# Altium PCB Angle-Sensor_V1.0.PcbDoc
Units mil, origin at the board's own origin, x right, y up, seen from the top; angles counter-clockwise.
Board outline 2411.27 x 649.61 mil, 2 copper layers (Top Layer, Bottom Layer), stack 60.967 mil thick; 12 components, 8 nets, 32 pads, 66 vias.
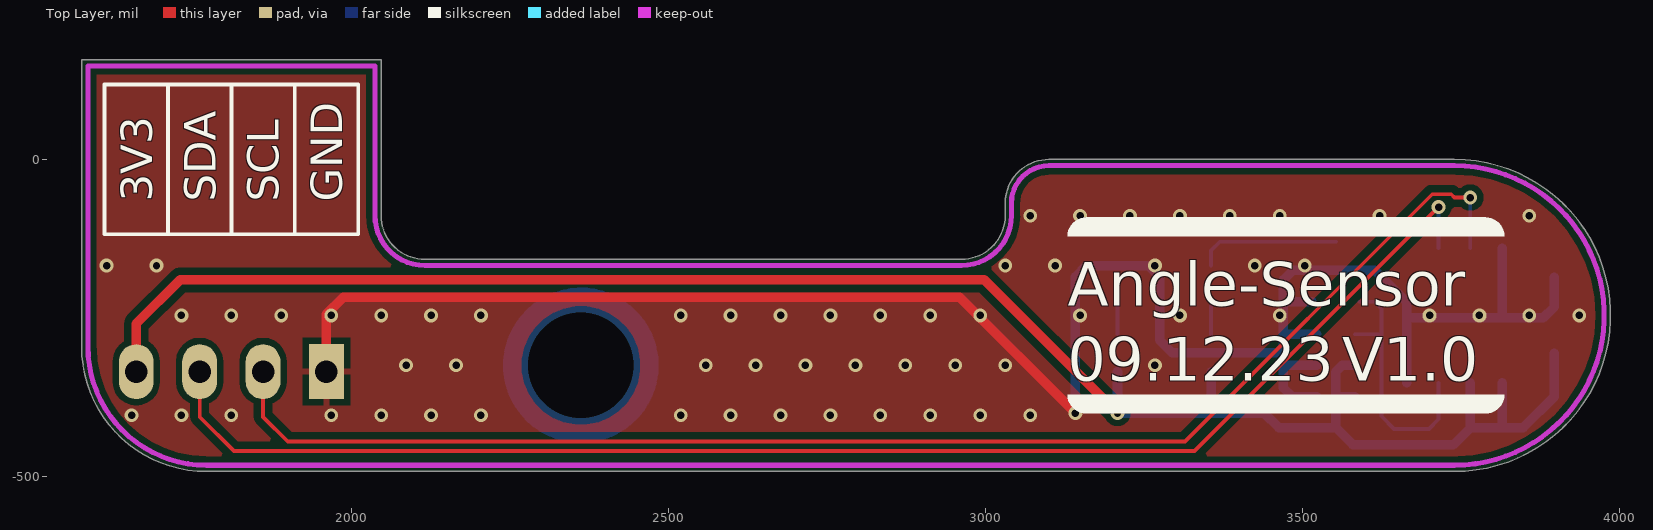
[diagram p0: Top Layer view]
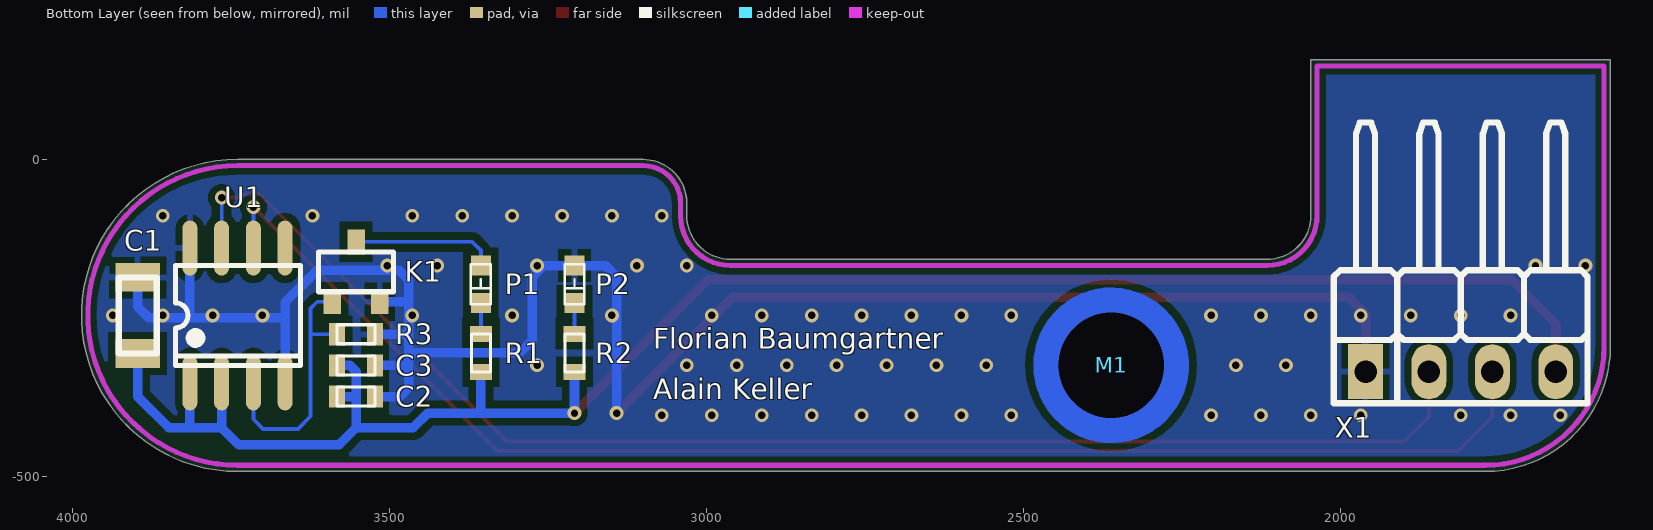
[diagram p1: Bottom Layer view, seen from below]

## Layer stack, top to bottom
Top Solder: solder mask 0.3937, Solder Resist, Dk 3.5
Top Layer: signal copper 1.4173
Dielectric1: dielectric 58.1323, FR-4, Dk 4.8
Bottom Layer: signal copper 1.4173
Bottom Solder: solder mask 0.3937, Solder Resist, Dk 3.5

## Board outline
1574.8,-295.28 1574.8,157.48 2047.24,157.48 2047.24,-88.58 ccw(c2116.14,-88.58) 2116.14,-157.48 2962.6,-157.48 ccw(c2962.6,-88.58) 3031.5,-88.58 3031.5,-68.9 cw(c3100.39,-68.9) 3100.39,0 3740.16,0 cw(c3740.16,-246.06) 3740.16,-492.13 1771.65,-492.13 cw(c1771.65,-295.28)

## Design rules (kind name [scope] priority, off if disabled: settings)
Clearance "Stitching GND" [IsStitchingVia and InNet('GND') vs (IsVia and (Not IsStitchingVia)) Or IsPad] p1: gap=5 ignorepadtopadclearanceinfootprint=FALSE
Clearance Clearance_Poly_GND_DiffPair [InPolygon and (InNet('GND') OR InNet('3V3') OR InNet('5V') OR InNet('1V8')) vs InAnyDifferentialPair] p2: gap=33 ignorepadtopadclearanceinfootprint=FALSE
Clearance Clearance_Poly_GND_Top [InPolygon and InNet('GND') vs OnLayer('Top Layer')] p3: gap=12 ignorepadtopadclearanceinfootprint=FALSE
Clearance Clearance_Poly_GND_Bottom [InPolygon and InNet('GND') vs OnLayer('Bottom Layer')] p4: gap=12 ignorepadtopadclearanceinfootprint=FALSE
Clearance Clearance_Poly [InPolygon vs Not InNet('GND')] p5: gap=10 ignorepadtopadclearanceinfootprint=FALSE
Clearance Clearance_Via [isvia AND (AsMM(HoleDiameter) = 0.2) vs isvia AND (AsMM(HoleDiameter) = 0.2)] p6: gap=9.8 ignorepadtopadclearanceinfootprint=FALSE
Clearance [All] p7: gap=3.5 ignorepadtopadclearanceinfootprint=FALSE except(5: SMDPad-SMDPad)
ComponentClearance Component_Display [(Identifier = 'Spacer') OR (Identifier = 'Baseplate')] p1: gap=0 collisioncheckmode=3 verticalgap=0 showdistances=FALSE
ComponentClearance Component_Connectors [(Footprint = 'SMD Connector (SM04B-SRSS-TB)')] p2: gap=0 collisioncheckmode=3 verticalgap=0 showdistances=FALSE
ComponentClearance [All] p3: gap=0 collisioncheckmode=3 verticalgap=1.57 showdistances=TRUE
DiffPairsRouting [All] p1: maxlimit=100 minlimit=3.5 mostfreqgap=5 toplayer_minwidth=5 toplayer_maxwidth=15 toplayer_prefwidth=5 bottomlayer_minwidth=5 bottomlayer_maxwidth=15 bottomlayer_prefwidth=5 maxuncoupledlength=500
Height [All] p1: minheight=0 maxheight=5905.51 prefheight=78.74
HoleSize [All] p1: absolutevalues=TRUE maxlimit=800 minlimit=7.87 maxpercent=80.000 minpercent=20.000
HoleToHoleClearance [InDrillLayerPair('Top Layer - Bottom Layer')] p1: gap=19.68 allowstackedmicrovias=FALSE
MinimumAnnularRing [All] p1: minimumring=3.5
MinimumSolderMaskSliver [All] p1: minsoldermaskwidth=0
PlaneConnect [All] p1: pad.planeconnectstyle=Relief pad.reliefexpansion=20 pad.reliefentries=4 pad.reliefconductorwidth=10 pad.reliefairgap=10 via.planeconnectstyle=Direct via.reliefexpansion=20 via.reliefentries=4 via.reliefconductorwidth=10 via.reliefairgap=10
PolygonConnect [All] p1: thpad.connectstyle=Relief thpad.reliefconductorwidth=10 thpad.reliefentries=4 thpad.polygonreliefangle="90 Angle" thpad.airgapwidth=10 smdpad.connectstyle=Relief smdpad.reliefconductorwidth=10 smdpad.reliefentries=4 smdpad.polygonreliefangle="90 Angle" smdpad.airgapwidth=10 via.connectstyle=Direct via.reliefconductorwidth=10 via.reliefentries=4 via.polygonreliefangle="90 Angle" via.airgapwidth=10
RoutingVias [All] p1: holewidth=11.81 width=24.41 viastyle="Through Hole" minholewidth=7.87 minwidth=17.32 maxholewidth=31.5 maxwidth=43.31
SilkToSilkClearance [All] p1: silktosilkclearance=0
SilkToSolderMaskClearance [IsPad] p1: minsilkscreentomaskgap=0 clearancetoexposedcopper=TRUE
SolderMaskExpansion [All] p1: expansion=4 istentingtop=FALSE
Width [Not InNet('No Net')] p1: maxlimit=157.48 minlimit=3.5 preferedwidth=10
Width Logos [All] p2: maxlimit=10 minlimit=0.1 preferedwidth=0.1
21 further rules are at their usual default settings.

## Components (designator, comment, footprint, x,y, rotation, side; value= is the part's Value field where it differs from the comment)
C1 "10µF" "SMD Keramikkondensator 1206" 3897.64,-246.06 r270 bottom
C2 "1µF" "SMD Keramikkondensator 0603" 3553.15,-374.02 r0 bottom
C3 "100nF" "SMD Keramikkondensator 0603" 3553.15,-324.8 r180 bottom
K1 "2N7002" "SMD MOSFET SOT-23" 3553.15,-177.17 r90 bottom
M1 "SMTSO-M3-3ET" "SMD Solder-Nut (M3 3mm)" 2362.2,-324.8 r180 bottom locked
P1 "Yellow" "SMD LED 0603" 3356.3,-196.85 r90 bottom
P2 "Green" "SMD LED 0603" 3208.66,-196.85 r90 bottom
R1 "1k" "SMD Widerstand 0603" 3356.3,-305.12 r270 bottom
R2 "1k" "SMD Widerstand 0603" 3208.66,-305.12 r270 bottom
R3 "10k" "SMD Widerstand 0603" 3553.15,-275.59 r0 bottom
U1 "AS5600" "SMD IC SOIC-8" 3740.16,-246.06 r0 bottom
X1 "PZ254R-11-04P" "THT Pin-Header 4x1 (90°)" 1811.02,-334.65 r180 bottom locked

## Footprints (in the part's own frame and the unit in brackets; to place one, negate y for a bottom-side part, rotate by r counter-clockwise, add the part's x,y. Pads: shape width x height; smd on the part's side, far side on the other; paste and mask are expansions set on the pad)
"SMD IC SOIC-8" [mm]
  oval 0.6x2.2 smd: 1(1.905,2.7) 2(0.635,2.7) 3(-0.635,2.7) 4(-1.905,2.7) 5(-1.905,-2.7) 6(-0.635,-2.7) 7(0.635,-2.7) 8(1.905,-2.7)
  silkscreen extent -2.52,-2 2.48,2, body extent -2.52,-3.12 2.48,3.12, height 1.75
"SMD Keramikkondensator 0603" [mil]
  rect 25x35 smd: 1(-30,0) 2(30,0)
  silkscreen extent -30,-15 30,15, body extent -31,-16 31,16, height 32
"SMD Keramikkondensator 1206" [mil]
  rect 45x70 smd: 1(-60,0) 2(60,0)
  silkscreen extent -60,-30 60,30, body extent -63,-31 63,31, height 39
"SMD LED 0603" [mm] "SMD_LED_RED"
  rect 0.8x0.8 smd: A(-0.75,0) K(0.75,0)
  silkscreen extent -0.8,-0.4 0.8,0.4, body extent -0.81,-0.37 0.84,0.36, height 0.68
"SMD MOSFET SOT-23" [mm]
  rect 1x0.7 smd: D(1.2,0) G(-1.2,0.95) S(-1.2,-0.95)
  silkscreen extent -0.8,-1.5 0.8,1.5, body extent -1.3,-1.5 1.2,1.5, height 1.1
"SMD Solder-Nut (M3 3mm)" [mm]
  round 0 hole 4.22: 1(0,0)
  Top Layer circle w1.02: c0,0 r2.61
  body extent -2.61,-2.61 2.61,2.61, height 3
"SMD Widerstand 0603" [mil]
  rect 25x35 smd: 1(-30,0) 2(30,0)
  silkscreen extent -30,-15 30,15, body extent -31,-16 31,16, height 18
"THT Pin-Header 4x1 (90°)" [mm]
  rect 1.4x2.2 hole 0.9: 1(-3.81,0)
  oval 1.4x2.2 hole 0.9: 2(-1.27,0) 3(1.27,0) 4(3.81,0)
  silkscreen extent -5.08,-1.27 5.08,9.98, body extent -5.08,-0.38 5.08,9.98, height 2.54

## Part data
C1: library part "E6 - 10uF", "SMD Ceramic Capacitor E6", Component Value="10µF 50V", JLC-Parts=C13585, Component Description="Multilayer Ceramic Capacitors MLCC", ComponentLink1Description=Datasheet, ComponentLink1URL=https://datasheet.lcsc.com/lcsc/1810191219_Samsung-Electro-Mechanics-CL10A106KP8NNNC_C19702.pdf, Digikey=587-3258-1-ND, Farnell=2113070, Mouser=963-LMK107BBJ106MALT, Unit Price=0.01
C2: library part C-CAPACITOR, "CAP-MK", Component Value="1µF 50V", JLC-Parts=C15849, Component Description="Multilayer Ceramic Capacitors", Digikey=1276-1860-1-ND, Farnell=3013383, Mouser=187-CL10A105KB8NNNC, Unit Price=0.01
C3: library part "E6 - 100nF", "SMD Ceramic Capacitor E6", Component Value="100nF 50V", JLC-Parts=C14663, Component Description="Multilayer Ceramic Capacitors", ComponentLink1Description=Datasheet, ComponentLink1URL=https://datasheet.lcsc.com/lcsc/1809301912_YAGEO-CC0603KRX7R9BB104_C14663.pdf, Digikey=445-5666-1-ND, Farnell=2522432, Mouser=77-VJ0603V104ZXAPBC, Unit Price=0.01
K1: library part K-FET:NIGE, "MOSFET N-Channel", JLC-Parts=C8545, Component Description="MOSFET N-Channel", Component Value=2N7002, ComponentLink1Description=Datasheet, ComponentLink1URL=https://datasheet.lcsc.com/lcsc/1810151612_Jiangsu-Changjing-Electronics-Technology-Co---Ltd--2N7002_C8545.pdf, Digikey=2N7002NCT-ND, Farnell=1713823, Mouser=512-2N7002, Unit Price=0.02
M1: library part M-Spacer_M3_3mm, "Solderable Standoff Nut", Component Value="M3 3mm", JLC-Parts=C2915308, Component Description="Solderable Standoff Nut", ComponentLink1Description=Datasheet, ComponentLink1URL=https://datasheet.lcsc.com/lcsc/2112061830_Sinhoo-SMTSO3030CTJ_C2915308.pdf, Mouser=153-SMTSO-M3-3ET, Unit Price=0.05
P1: library part P-LED, "LED (als Lampe E / alt H)", Component Value="Yellow (5mA, 2.1V)", JLC-Parts=C72038, Component Description="General Purpose LED", ComponentLink1Description=Datasheet, ComponentLink1URL=https://datasheet.lcsc.com/szlcsc/Everlight-Elec-19-213-Y2C-CQ2R2L-3T-CY_C72038.pdf, Digikey=350-2033-1-ND, Farnell=1867103, Mouser=645-598-8050-107F, Unit Price=0.34
P2: library part "LED Green 0603", "General Purpose LED", Component Value="Green (5mA, 2.4V)", JLC-Parts=C72043, Component Description="General Purpose LED", ComponentLink1Description=Datasheet, ComponentLink1URL=https://datasheet.lcsc.com/szlcsc/Everlight-Elec-19-217-GHC-YR1S2-3T_C72043.pdf, Digikey=350-2035-1-ND, Farnell=1465991, Mouser=645-598-8070-107F, Unit Price=0.34
R1 R2: library part R-RESISTOR, "RES (E=Heizwiderstand B=Messwandler)", Component Value="1k (75V, 100mW, 1%)", JLC-Parts=C21190, Component Description="Dickschicht Chipwiderstand", Digikey=P1.00KHCT-ND, Farnell=2303145, Mouser=667-ERJ-3EKF1001V, Unit Price=0.01
R3: library part R-RESISTOR, "RES (E=Heizwiderstand B=Messwandler)", Component Value="10k (75V, 100mW, 1%)", JLC-Parts=C25804, Component Description="Thick Film Chip Resistor", Digikey=P10.0KHCT-ND, Farnell=2303192, Mouser=667-ERJ-3EKF1002V, Unit Price=0.01
U1: library part U-AS5600, "Digital Magnetic Angle Sensor", JLC-Parts=C499458, Component Description="Digital Magnetic Angle Sensor", Component Value=AS5600, ComponentLink1Description=Datasheet, ComponentLink1URL=https://ams.com/documents/20143/36005/AS5600_DS000365_5-00.pdf, Digikey=AS5600-ASOMCT-ND, Farnell=4158625, Mouser=985-AS5600-ASOM, Unit Price=1.32
X1: library part "X-Stiftleiste (4-Fach, Right-Angle)", "Pin Header (Right-Angle)", JLC-Parts=C492412, Component Description="Pin Header (Right-Angle)", Component Value=PZ254R-11-04P, Digikey=952-3286-ND, Farnell=3226010, Mouser=855-M20-9960445, Unit Price=0.02

## Via types
v1: diameter 21.65, hole 11.81, Top Layer to Bottom Layer, tented both sides, 66 vias

## Nets (pads, with @x,y where several pads share a name; then routed paths per layer and width w, separated by ;. In a path a pad name is that pad's centre, name@x,y a point inside that pad or via, vN(x,y) a via of type N, cw(c..) or ccw(c..) an arc to the next point about the centre after c; other vN are vias at no path point)
3V3: C1.2 C2.2 C3.1 R1.2 R2.2 U1.1 U1.2 X1.4 | length 2972.1
  Top Layer w15: X1.4 1661.02,-258.98 1730,-190 2998.66,-190 v1(3208.66,-400)
  Bottom Layer w15: R2.2 v1(3208.66,-400) 3356.3,-400 ; R1.2 3356.3,-400 ; C2.2 3553.15,-374.02 ; C3.1 3562.99,-324.8 3553.15,-334.65 3553.15,-374.02 ; U1.2 3765.16,-423.23 ; U1.1 3815.16,-423.23 ; C1.2 3897.64,-374.02 3848.43,-423.23 3815.16,-423.23 ; 3356.3,-400 3440,-400 3463.23,-423.23 3553.15,-423.23 ; 3553.15,-423.23 3579.92,-450 3738.39,-450 3765.16,-423.23 ; 3553.15,-423.23 3553.15,-374.02 ; 3765.16,-423.23 3815.16,-423.23
GND: C1.1 C2.1 C3.2 K1.S P2.K R3.1 U1.4 U1.8 X1.1 | length 3153.9
  Top Layer w15: X1.1 1961.02,-243.98 1987.48,-217.52 2959.84,-217.52 v1(3142.32,-400)
  Bottom Layer w15: v1(3142.32,-400) 3142.32,-185 3160,-167.32 P2.K 3257.32,-167.32 3275,-185 3275,-285 3295,-305 3465,-305 3470,-310 ; K1.S 3470.59,-224.41 3470,-225 ; C2.1 3484.02,-374.02 3470,-360 3470,-325 ; C3.2 3470.2,-324.8 3470,-325 ; R3.1 3470.59,-275.59 3470,-275 ; U1.4 3665.16,-250.16 ; U1.8 3815.16,-249.84 3815,-250 ; C1.1 3897.64,-232.36 3880,-250 3815,-250 ; 3470,-325 3470,-310 ; 3470,-310 3470,-275 ; 3470,-275 3470,-225 ; 3470,-225 3470,-190 3485,-175 3615,-175 3665.16,-225.16 3665.16,-250 ; 3665.16,-250.16 3665.16,-250 ; 3665.16,-250.16 3665,-250 3665.16,-250 ; 3665.16,-250 3815,-250
  other v1: 1653.55,-403.54 1732.29,-403.54 1811.03,-403.54 1968.51,-403.54 2047.25,-403.54 2125.99,-403.54 2204.73,-403.54 2519.69,-403.54 2598.43,-403.54 2677.17,-403.54 2755.91,-403.54 2834.65,-403.54 2913.39,-403.54 2992.13,-403.54 3070.87,-403.54 2086.62,-324.8 2165.36,-324.8 2559.06,-324.8 2637.8,-324.8 2716.54,-324.8 2795.28,-324.8 2874.02,-324.8 2952.76,-324.8 3031.5,-324.8 3267.72,-324.8 1732.29,-246.06 1811.03,-246.06 1889.77,-246.06 1968.51,-246.06 2047.25,-246.06 2125.99,-246.06 2204.73,-246.06 2519.69,-246.06 2598.43,-246.06 2677.17,-246.06 2755.91,-246.06 2834.65,-246.06 2913.39,-246.06 2992.13,-246.06 3149.61,-246.06 3307.09,-246.06 3464.57,-246.06 3700.79,-246.06 3779.53,-246.06 3858.27,-246.06 3937.01,-246.06 1614.18,-167.32 1692.92,-167.32 3031.5,-167.32 3110.24,-167.32 3267.72,-167.32 3425.2,-167.32 3503.94,-167.32 3070.87,-88.58 3149.61,-88.58 3228.35,-88.58 3307.09,-88.58 3385.83,-88.58 3464.57,-88.58 3622.05,-88.58 3858.27,-88.58
NetK1_D: K1.D P1.K | length 226.2
  Bottom Layer w6: P1.K 3356.3,-143.7 3370.08,-129.92 K1.D
NetK1_G: K1.G R3.2 U1.3 | length 412.9
  Bottom Layer w6: R3.2 3625,-275.59 ; K1.G 3614.41,-224.41 3625,-235 3625,-275.59 ; U1.3 3715.16,-409.84 3700,-425 3645,-425 3625,-405 3625,-275.59
NetP1_A: P1.A R1.1 | length 48.7
  Bottom Layer w6: R1.1 P1.A
NetP2_A: P2.A R2.1 | length 48.7
  Bottom Layer w6: R2.1 P2.A
NetU1_6: U1.6 X1.3 | length 2272
  Top Layer w6: X1.3 1761.02,-406.02 1815,-460 3330,-460 v1(3715,-75)
  Bottom Layer w6: v1(3715,-75) 3715,-139.61 U1.6
NetU1_7: U1.7 X1.2 | length 2234.8
  Top Layer w6: X1.2 1861.02,-406.02 1899.88,-444.88 3315.12,-444.88 3705,-55 3735,-55 3740.16,-60.16 v1(3765.16,-60.16)
  Bottom Layer w6: U1.7 v1(3765.16,-60.16)
pads on no net: M1.1 U1.5
copper on no net:
  other v1: 5523.62,-4163.39

## Polygon pours and split planes (outlines as drawn)
GND on Top Layer "NONET_L-01_P-001" (solid, remove dead copper, pour order 0): 1574.8,157.48 2047.24,157.48 2047.24,-88.58 ccw(c2116.14,-88.58) 2116.14,-157.48 2962.6,-157.48 ccw(c2962.6,-88.58) 3031.5,-88.58 3031.5,-68.9 cw(c3100.39,-68.9) 3100.39,0 3740.16,0 cw(c3740.16,-246.06) 3986.22,-246.06 cw(c3740.16,-246.06) 3740.16,-492.13 1771.65,-492.13 cw(c1771.65,-295.28) 1574.8,-295.28
GND on Bottom Layer "NONET_L-01_P-001" (solid, remove dead copper, pour order 1): 1574.8,157.48 2047.24,157.48 2047.24,-88.58 ccw(c2116.14,-88.58) 2116.14,-157.48 2962.6,-157.48 ccw(c2962.6,-88.58) 3031.5,-88.58 3031.5,-68.9 cw(c3100.39,-68.9) 3100.39,0 3740.16,0 cw(c3740.16,-246.06) 3986.22,-246.06 cw(c3740.16,-246.06) 3740.16,-492.13 1771.65,-492.13 cw(c1771.65,-295.28) 1574.8,-295.28

## Keep-outs
Keep-Out Layer:
  lines w8: 1584.65,-295.28 ccw(c1771.65,-295.28) 1771.65,-482.28 3740.16,-482.28 ccw(c3740.16,-246.06) 3740.16,-9.84 3100.39,-9.84 ccw(c3100.39,-68.9) 3041.34,-68.9 3041.34,-88.58 cw(c2962.6,-88.58) 2962.6,-167.32 2116.14,-167.32 cw(c2116.14,-88.58) 2037.4,-88.58 2037.4,147.64 1584.65,147.64 1584.65,-295.28

## Silkscreen, mask and mechanical layers (free items; w line width, h text height)
Top Overlay:
  region: 3129.92,-121.02 cw(c3159.45,-121.02) 3159.45,-91.49 3789.37,-91.49 cw(c3789.37,-121.02) 3818.9,-121.02
  region: 3129.92,-371.11 ccw(c3159.45,-371.11) 3159.45,-400.64 3789.37,-400.64 ccw(c3789.37,-371.11) 3818.9,-371.11
  lines w6: 1711.02,-118.11 1711.02,118.11 ; 1811.02,-118.11 1811.02,118.11 ; 1911.02,-118.11 1911.02,118.11 ; 1611.02,-118.11 2011.02,-118.11 2011.02,118.11 1611.02,118.11 1611.02,-118.11
  text "3V3" at 1686.02,-66.65 h50 r90
  text "SDA" at 1786.02,-66.65 h50 r90
  text "SCL" at 1886.02,-66.65 h50 r90
  text "GND" at 1986.02,-66.65 h50 r90
  text "Angle-Sensor" at 3129.92,-253.62 h118.11
  text "09.12.23" at 3129.92,-371.73 h118.11
  text "V1.0" at 3562.99,-371.73 h118.11
Bottom Overlay:
  text "Florian Baumgartner" at 3084.55,-298.3 h32
  text "Alain Keller" at 3084.55,-377.86 h32
Mechanical 1:
  the board outline again, w10
Mechanical 15:
  lines w5: -3014.96,-2046.85 -2814.96,-2046.85 ; -3014.96,-146.85 -2814.96,-146.85 ; -3014.96,1753.15 -2814.96,1753.15 ; -2814.96,-3446.85 1685.04,-3446.85 ; -2814.96,-3146.85 1685.04,-3146.85 ; -1914.96,-3746.85 -1914.96,-3146.85 ; -139.96,-3946.85 -139.96,-3746.85 ; -139.96,3453.15 -139.96,3653.15 ; 185.04,-3746.85 185.04,-3146.85 185.04,-2546.85 ; 185.04,-2846.85 1685.04,-2846.85 ; 2735.04,-3946.85 2735.04,-3746.85 ; 2735.04,3453.15 2735.04,3653.15 ; 3085.04,-3746.85 1685.04,-3746.85 ; 5610.04,-3946.85 5610.04,-3746.85 ; 5610.04,3453.15 5610.04,3653.15 ; 7894.49,-2057.09 8094.49,-2057.09 ; 7894.49,-127.95 8094.49,-127.95 ; 7894.49,1761.81 8094.49,1761.81 ; -2814.96,-3746.85 7894.49,-3750 7894.49,3454.72 -2814.96,3453.15 -2814.96,-3746.85 ; -2814.96,-3746.85 1685.04,-3746.85 ; -2814.96,-3746.85 -2814.96,-2546.85 185.04,-2546.85 ; 185.04,-2546.85 1685.04,-2546.85 1685.04,-3746.85 ; -3014.96,-3946.85 8091.34,-3946.85 8091.34,3651.57 -3014.96,3653.15 -3014.96,-3946.85
  text "4" at -1551.96,3518.15 h70
  text "3" at 1318.04,3518.15 h70
  text "2" at 4198.04,3518.15 h70
  text "1" at 7058.04,3518.15 h70
  text "A" at 8051.97,2627.95 h70
  text "A" at -2889.96,2612.15 h70
  text "B" at 8012.6,738.19 h70
  text "B" at -2889.96,720.15 h70
  text "C" at -2889.96,-1189.85 h70
  text "C" at 8012.6,-1190.94 h70
  text "TITLE:" at 135.04,-2646.85 h45
  text "ENGINEER:" at 1635.04,-2646.85 h45
  text "Florian Baumgartner" at 1576.14,-2798.15 h70
  text "PCB DESIGNER:" at 1635.04,-2941.85 h45
  text "Angle-Sensor" at 110.59,-2965.16 h157.48
  text "D" at -2889.96,-3079.85 h70
  text "D" at 8012.6,-3080.71 h70
  text "Florian Baumgartner" at 1576.14,-3098.15 h70
  text "REV:" at -1964.96,-3246.85 h45
  text "PART NO.:" at 135.04,-3246.85 h45
  text "DATE:" at 1635.04,-3246.85 h45
  text "02.12.2023" at 1585.04,-3366.85 h70
  text "V1.1" at -1998.86,-3398.15 h70
  text "1/1" at 126.14,-3398.15 h70
  text "SCALE:" at -1964.96,-3546.85 h45
  text "DWG NO:" at 135.04,-3546.85 h45
  text "FILE NAME:" at 1635.04,-3546.85 h45
  text "Angle-Sensor_V1.0.PcbDoc" at 1576.14,-3673.15 h57.09
  text "1:1" at -1998.86,-3698.15 h70
  text "1/1" at 126.14,-3698.15 h70
  text "4" at -1551.96,-3881.85 h70
  text "3" at 1318.04,-3881.85 h70
  text "2" at 4198.04,-3881.85 h70
  text "1" at 7058.04,-3881.85 h70
Mechanical 16:
  lines w5: -3014.96,-2057.09 -2814.96,-2057.09 ; -3014.96,-127.95 -2814.96,-127.95 ; -3014.96,1761.81 -2814.96,1761.81 ; -530.51,-3946.85 -530.51,-3746.85 ; -530.51,3453.15 -530.51,3653.15 ; 1994.49,-3746.85 3394.49,-3746.85 ; 2344.49,-3946.85 2344.49,-3746.85 ; 2344.49,3453.15 2344.49,3653.15 ; 3394.49,-3446.85 7894.49,-3446.85 ; 3394.49,-3146.85 7894.49,-3146.85 ; 3394.49,-2846.85 4894.49,-2846.85 ; 4894.49,-3746.85 4894.49,-3146.85 4894.49,-2546.85 ; 5219.49,-3946.85 5219.49,-3746.85 ; 5219.49,3453.15 5219.49,3653.15 ; 6994.49,-3746.85 6994.49,-3146.85 ; 7894.49,-2046.85 8094.49,-2046.85 ; 7894.49,-146.85 8094.49,-146.85 ; 7894.49,1753.15 8094.49,1753.15 ; 3394.49,-3746.85 3394.49,-2546.85 4894.49,-2546.85 ; 3394.49,-3746.85 7894.49,-3746.85 ; 4894.49,-2546.85 7894.49,-2546.85 7894.49,-3746.85 ; 7894.49,-3746.85 7894.49,3453.15 -2814.96,3454.72 -2814.96,-3750 7894.49,-3746.85 ; -3011.81,-3946.85 -3011.81,3651.57 8094.49,3653.15 8094.49,-3946.85 -3011.81,-3946.85
  text "1" at -1978.51,3518.15 h70
  text "2" at 881.49,3518.15 h70
  text "3" at 3761.49,3518.15 h70
  text "4" at 6631.49,3518.15 h70
  text "A" at -2972.44,2627.95 h70
  text "A" at 7969.49,2612.15 h70
  text "B" at -2933.07,738.19 h70
  text "B" at 7969.49,720.15 h70
  text "C" at 7969.49,-1189.85 h70
  text "C" at -2933.07,-1190.94 h70
  text "ENGINEER:" at 3444.49,-2646.85 h45
  text "TITLE:" at 4944.49,-2646.85 h45
  text "Florian Baumgartner" at 3485.59,-2798.15 h70
  text "PCB DESIGNER:" at 3444.49,-2941.85 h45
  text "Angle-Sensor" at 4960.59,-2965.16 h157.48
  text "D" at 7969.49,-3079.85 h70
  text "D" at -2933.07,-3080.71 h70
  text "Florian Baumgartner" at 3485.59,-3098.15 h70
  text "DATE:" at 3444.49,-3246.85 h45
  text "PART NO.:" at 4944.49,-3246.85 h45
  text "REV:" at 7044.49,-3246.85 h45
  text "02.12.2023" at 3494.49,-3366.85 h70
  text "1/1" at 4935.59,-3398.15 h70
  text "V1.1" at 7035.59,-3398.15 h70
  text "FILE NAME:" at 3444.49,-3546.85 h45
  text "DWG NO:" at 4944.49,-3546.85 h45
  text "SCALE:" at 7044.49,-3546.85 h45
  text "Angle-Sensor_V1.0.PcbDoc" at 3485.59,-3673.15 h57.09
  text "1/1" at 4935.59,-3698.15 h70
  text "1:1" at 7035.59,-3698.15 h70
  text "1" at -1978.51,-3881.85 h70
  text "2" at 881.49,-3881.85 h70
  text "3" at 3761.49,-3881.85 h70
  text "4" at 6631.49,-3881.85 h70

## Dimensions
1574.8,157.48 to 3740.16,-246.06 on Mechanical 4
3740.16,0 to 3740.16,-492.13 on Mechanical 4
1574.8,-295.28 to 2047.24,-88.58 on Mechanical 4
1574.8,-295.28 to 3986.22,-246.06 on Mechanical 4
1574.8,157.48 to 1771.65,-492.13 on Mechanical 4